# Altium PCB HV_Boost.PcbDoc
Units mm, origin at the board's own origin, x right, y up, seen from the top; angles counter-clockwise.
Board outline 160.78 x 71.12 mm, 4 copper layers (Power, Signal 1, Signal 2, GND), stack 0.603 mm thick; 49 components, 86 nets, 266 pads, 51 vias.
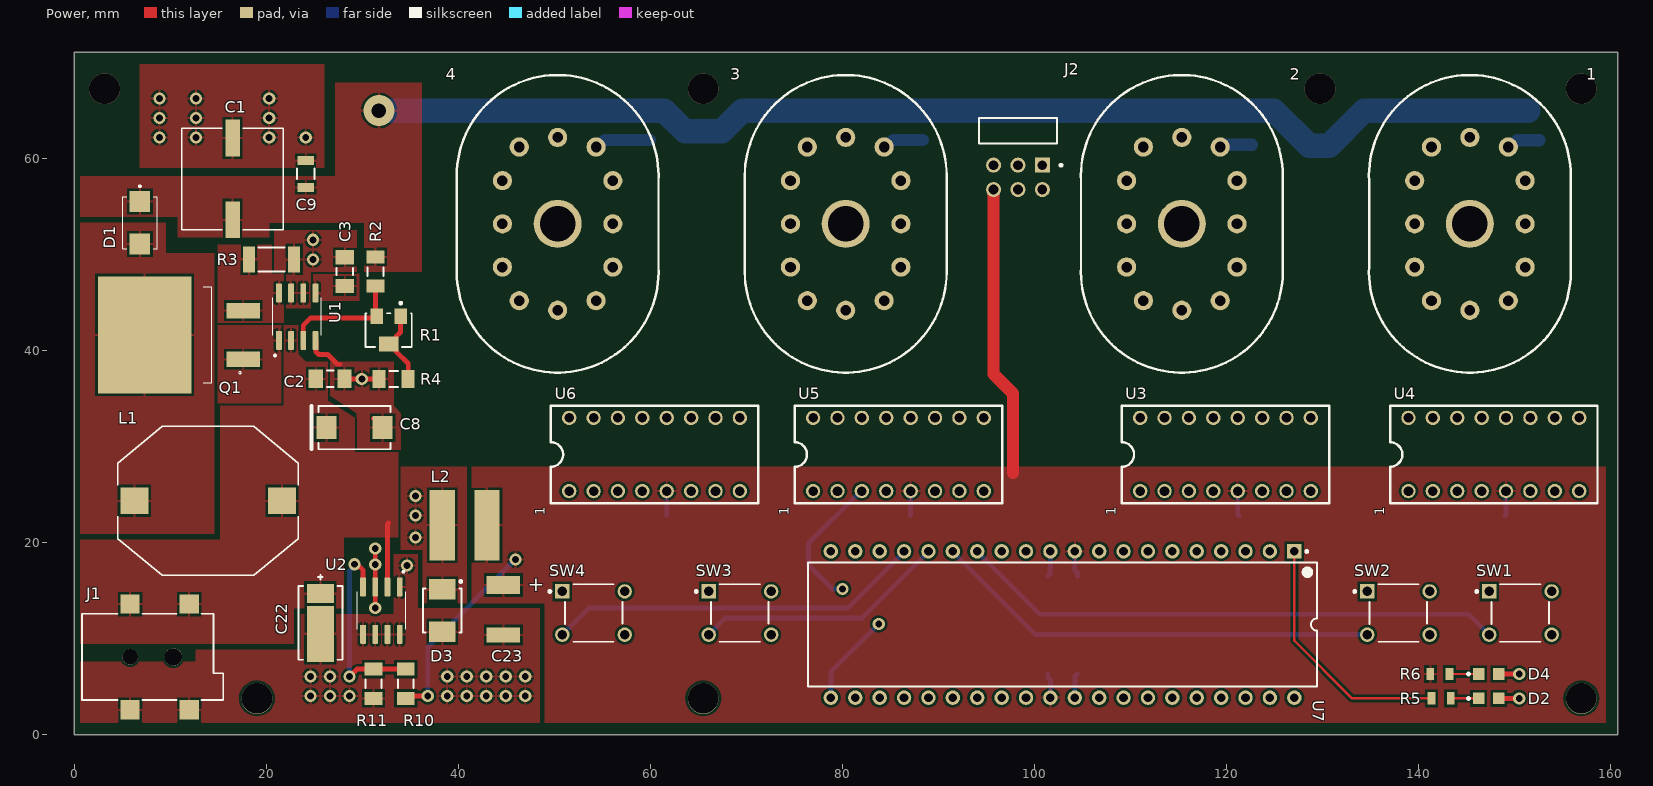
[diagram p0: Power view]
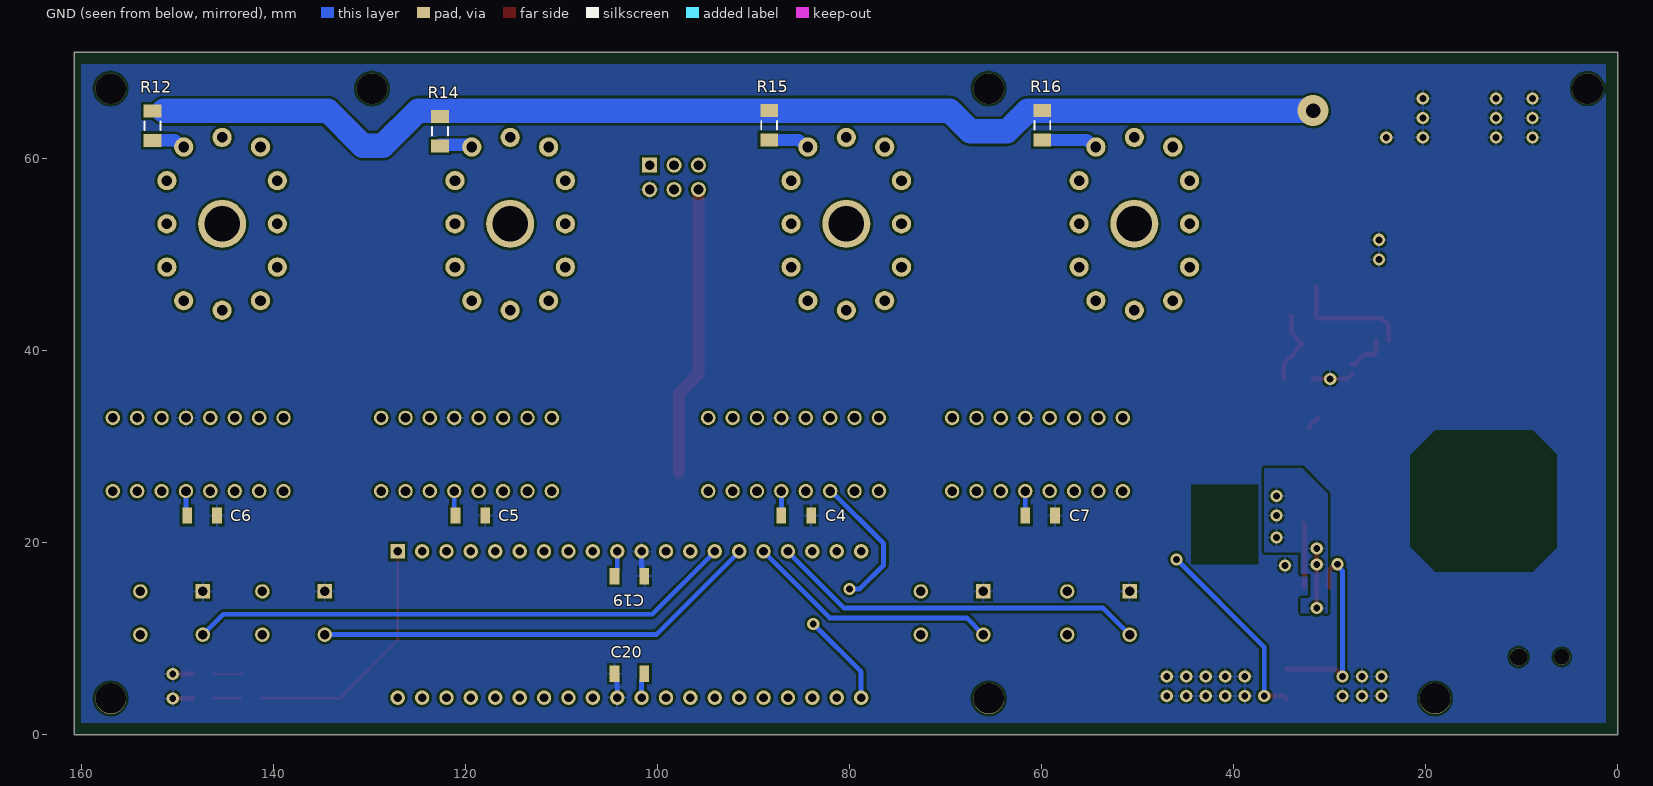
[diagram p1: GND view, seen from below]
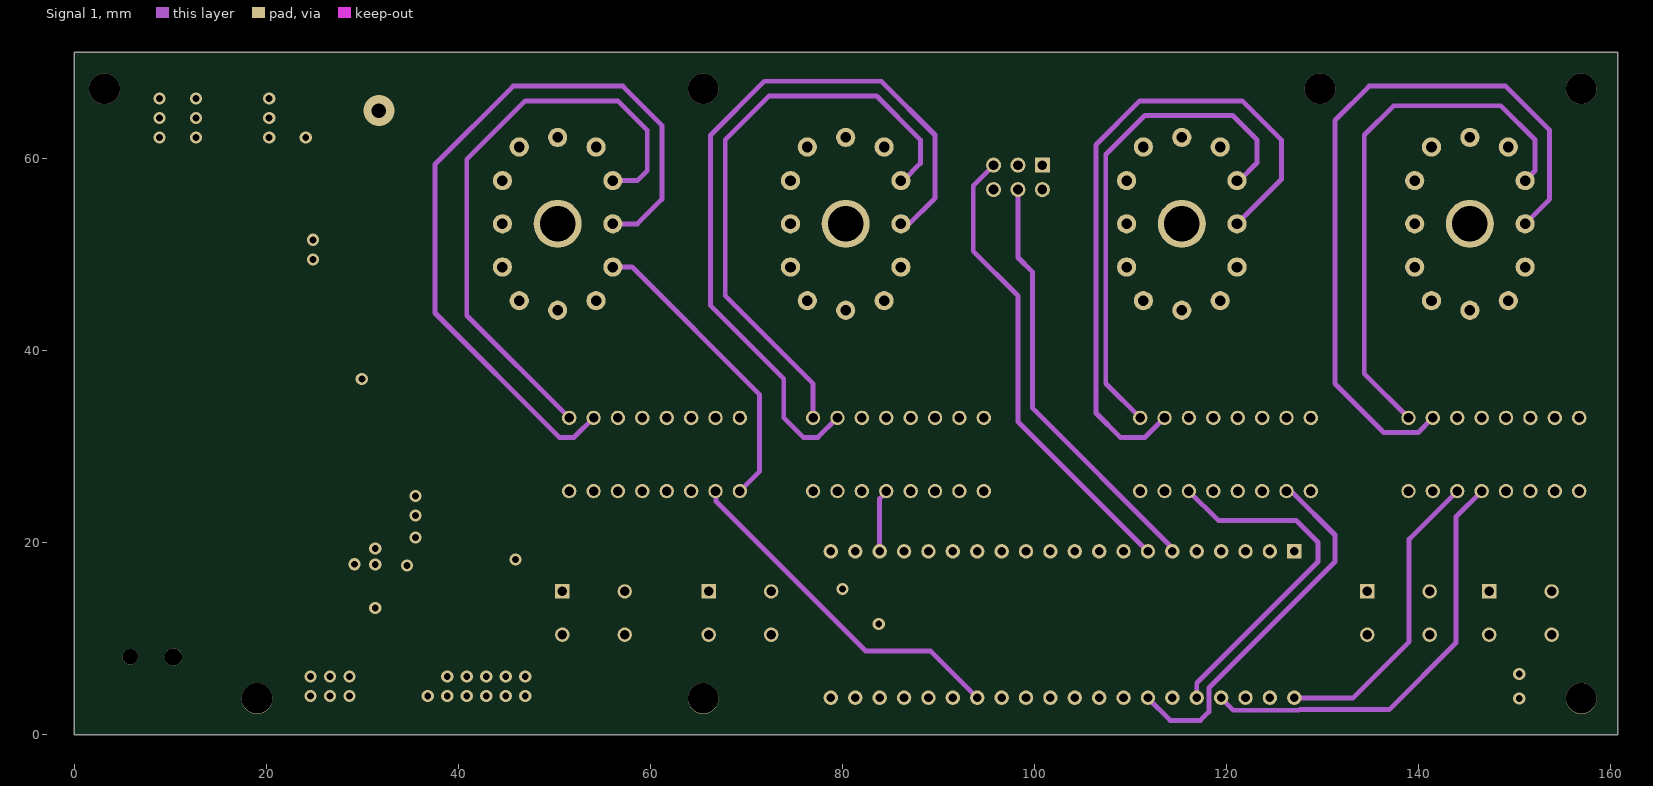
[diagram p2: Signal 1]
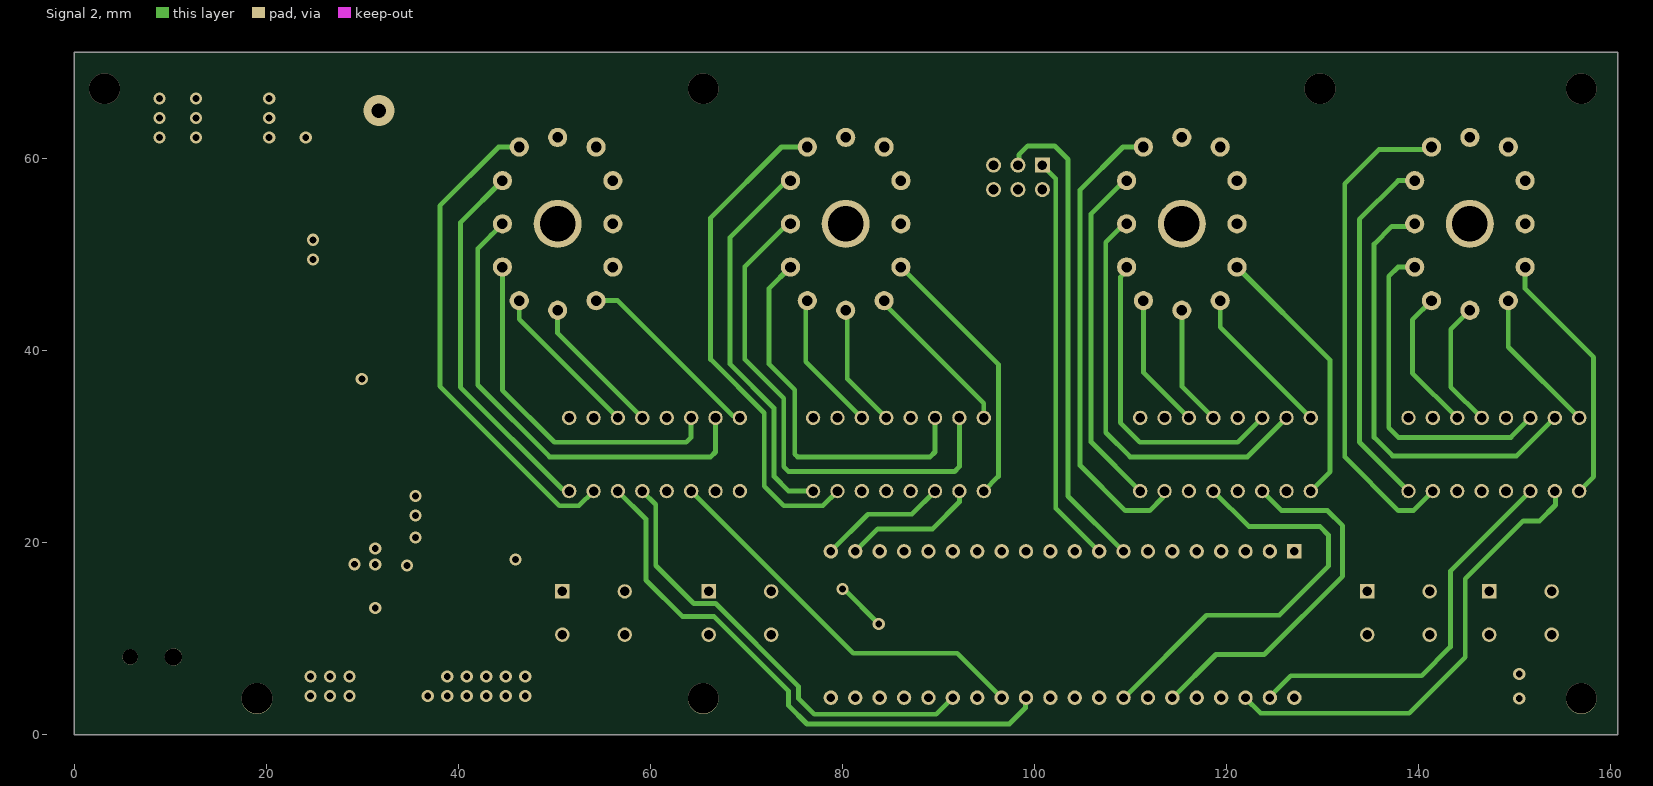
[diagram p3: Signal 2]
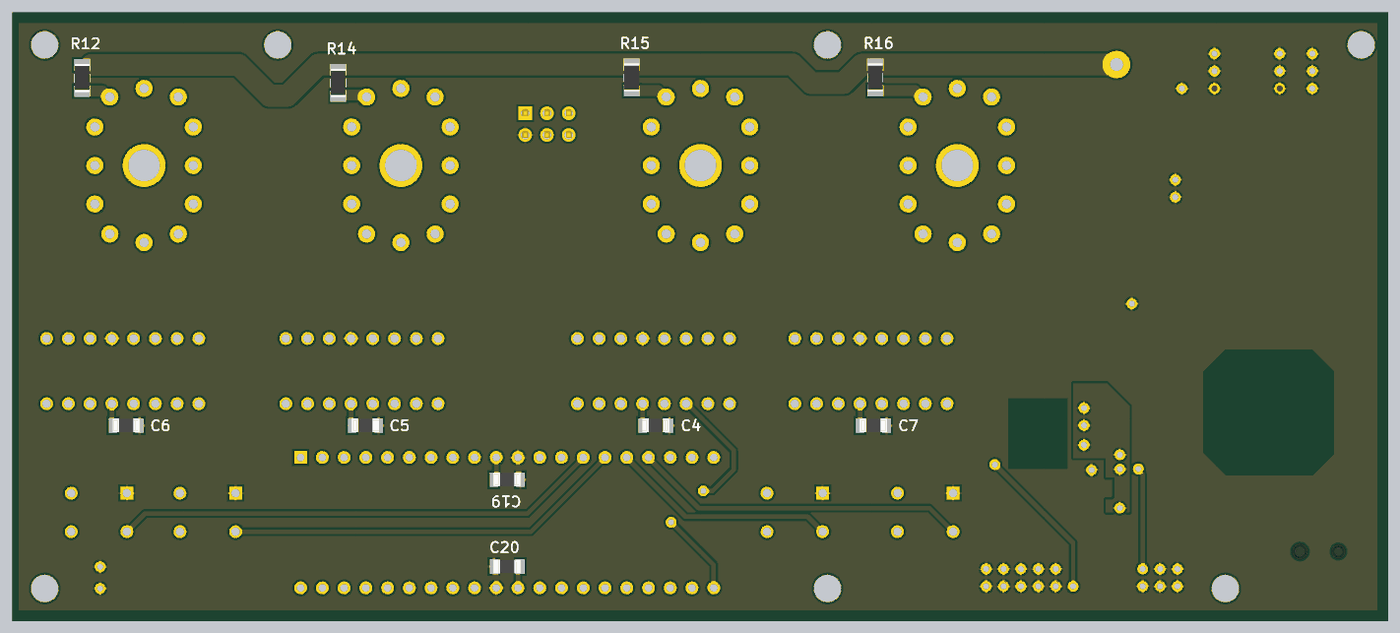
[diagram p4: 3D render of the assembled board from below, using the file's embedded part models]

## Layer stack, top to bottom
Top Solder: solder mask 0.0102, Solder Resist, Dk 3.5
Power: signal copper 0.0356
Dielectric 2: prepreg 0.0711, PP-006, Dk 4.1
Signal 1: signal copper 0.035
Dielectric 1: dielectric 0.32, FR-4, Dk 4.8
Signal 2: signal copper 0.035
Dielectric 3: prepreg 0.0711, PP-006, Dk 4.1
GND: signal copper 0.0356
Bottom Solder: solder mask 0.0102, Solder Resist, Dk 3.5

## Board outline
0,0 160.782,0 160.782,71.12 0,71.12

## Design rules (kind name [scope] priority, off if disabled: settings)
Clearance [All] p1: gap=0.254 ignorepadtopadclearanceinfootprint=FALSE except(0: Arc-Hole Track-Hole SMDPad-Hole THPad-Hole Via-Hole Fill-Hole Poly-Hole Region-Hole Text-Hole; 0.127: Arc-Arc Arc-Track Track-Track SMDPad-SMDPad; 0.2: Arc-SMDPad Arc-THPad Track-SMDPad Track-THPad; 0.5: THPad-THPad)
Height [All] p1: minheight=0 maxheight=50 prefheight=12.7
HoleSize [All] p1: absolutevalues=TRUE maxlimit=6.3 minlimit=0.2 maxpercent=80.000 minpercent=20.000
PolygonConnect [All] p1: connectstyle=Relief reliefconductorwidth=0.254 reliefentries=4 polygonreliefangle="90 Angle" airgapwidth=0.254
RoutingVias [All] p1: holewidth=0.711 width=1.27 viastyle="Through Hole" minholewidth=0.711 minwidth=1.27 maxholewidth=0.711 maxwidth=1.27
SolderMaskExpansion [All] p1: expansion=0.05 istentingtop=FALSE
Width [All] p1: maxlimit=2.54 minlimit=0.254 preferedwidth=0.254
28 further rules are at their usual default settings.

## Classes and differential pairs
component class MAX1771: C1 C2 C3 C8 C9 D1 L1 Q1 R1 R2 R3 R4 U1
component class MIC4690YM-TR: C22 C23 D3 D4 L2 L8 R6 R10 R11 U2
component class Buttons: SW1 SW2 SW3 SW4
component class ATMega1284p: C19 C20 D2 R5 U7
component class IN_12A: 1 2 3 4 C4 C5 C6 C7 R12 R14 R15 R16 U3 U4 U5 U6
component class Connectors: J1 J2

## Components (designator, comment, footprint, x,y, rotation, side; value= is the part's Value field where it differs from the comment)
1 "IN-12A" IN-12A 145.362,53.23 r0 top locked
2 "IN-12A" IN-12A 115.362,53.23 r0 top locked
3 "IN-12A" IN-12A 80.362,53.23 r0 top locked
4 "IN-12A" IN-12A 50.362,53.23 r0 top locked
C1 "EEV-EB2E100Q" CAP_UCD_10X10 16.51,57.912 r90 top
C2 "12065C104KAT2A" CAPC3216X94X50ML20T25 26.67,37.084 r0 top
C3 "12065C104KAT2A" CAPC3216X94X50ML20T25 28.194,48.26 r90 top
C4 "Capacitor - 0.1uF - 1206" FOOTPRINT-1206-GEN 85.572,22.86 r0 bottom value=0.1uF
C5 "Capacitor - 0.1uF - 1206" FOOTPRINT-1206-GEN 119.507,22.86 r0 bottom value=0.1uF
C6 "Capacitor - 0.1uF - 1206" FOOTPRINT-1206-GEN 147.447,22.86 r0 bottom value=0.1uF
C7 "Capacitor - 0.1uF - 1206" FOOTPRINT-1206-GEN 60.172,22.86 r0 bottom value=0.1uF
C8 "TPSD107K010R0100" AVX-7343-31_L 29.21,32.004 r0 top
C9 "C1206C104KARACTU" FP-C1206C-EB-MFG 24.13,58.42 r90 top value="0.10 μF"
C19 "Capacitor - 0.1uF - 1206" FOOTPRINT-1206-GEN 102.946,16.535 r0 bottom value=0.1uF
C20 "Capacitor - 0.1uF - 1206" FOOTPRINT-1206-GEN 102.946,6.375 r180 bottom value=0.1uF
C22 "47uF" FP-T528Z477M2R5ATE008-MFG 25.654,11.684 r90 top
C23 "595D107X06R3C2T" 595D107X06R3C2T 44.704,10.414 r0 top
D1 "ES2F" "DIOM5436X244N - duplicate" 6.858,53.34 r270 top
D2 "LGR971-KN-1" FOOTPRINT-OSRAM-CHIPLED-0805-1A2K 147.32,3.81 r0 top
D3 "SS22T3G" ONSC-SMB-2-403A-03_V 38.354,12.954 r270 top
D4 "LGR971-KN-1" FOOTPRINT-OSRAM-CHIPLED-0805-1A2K 147.32,6.35 r0 top
J1 "694106106102" 694106106102 7.692,8.128 r270 top
J2 "M20-9950345" FP-M20-9950345-MFG 98.298,62.865 r180 top locked
L1 "B82479A1104M000" IND_EPCOS_B82479A1 13.97,24.384 r0 top
L2 "CDRH6D38NP-180NC" CDRH6D38NP-180NC 38.354,21.844 r0 top
Q1 "IRF740 D2PAK" D2PAK 10.922,41.656 r180 top
R1 "3214W-1-502E" BOUR-3214W_V 32.766,42.164 r270 top
R2 "Resistor 1.5M +/-1% 1206 250 mW" RESC3216X60X45ML15T20 31.398,48.26 r90 top value=1.5M
R3 "0.05 1% 2010(5025)" RESC2010(5025)_N 20.574,49.53 r0 top value="100.00 Ohm"
R4 "Resistor 10k +/-1% 1206 250 mW" RESC3216X60X45ML15T20 33.274,37.084 r0 top value=10k
R5 "RMCF0805FT1K20" FOOTPRINT-0805-GEN 142.367,3.81 r180 top value=1.2k
R6 "RMCF0805FT1K20" FOOTPRINT-0805-GEN 142.24,6.35 r180 top value=1.2k
R10 "Resistor 3.01k +/-1% 1206 250 mW" RESC3216X60X45ML15T20 34.544,5.334 r270 top value=3.01k
R11 "Resistor 976 +/-1% 1206 250 mW" RESC3216X60X45ML15T20 31.193,5.334 r90 top value=976
R12 "Resistor 80k +/-1% 1206 250 mW" RESC3216X60X45ML15T20 152.603,63.449 r90 bottom value=80k
R14 "Resistor 80k +/-1% 1206 250 mW" RESC3216X60X45ML15T20 122.682,62.865 r90 bottom value=80k
R15 "Resistor 80k +/-1% 1206 250 mW" RESC3216X60X45ML15T20 88.392,63.5 r90 bottom value=80k
R16 "Resistor 80k +/-1% 1206 250 mW" RESC3216X60X45ML15T20 59.944,63.5 r90 bottom value=80k
SW1 "1825910-6" TECO-1825910-6_V 150.622,12.7 r0 top
SW2 "1825910-6" TECO-1825910-6_V 137.922,12.7 r0 top
SW3 "1825910-6" TECO-1825910-6_V 69.342,12.7 r0 top
SW4 "1825910-6" TECO-1825910-6_V 54.102,12.7 r0 top
U1 "MAX1771" 8-SOIC 23.241,43.561 r90 top
U2 "MIC4690YM-TR" TPS5402 32.004,12.954 r270 top
U3 "K155ID1" Socket_DIP_16 111.024,25.4 r90 top
U4 "K155ID1" Socket_DIP_16 138.964,25.4 r90 top
U5 "K155ID1" Socket_DIP_16 76.962,25.4 r90 top
U6 "K155ID1" Socket_DIP_16 51.562,25.4 r90 top
U7 "ATmega1284P-PU" 40P6 102.946,11.501 r270 top

## Footprints (in the part's own frame and the unit in brackets; to place one, negate y for a bottom-side part, rotate by r counter-clockwise, add the part's x,y. Pads: shape width x height; smd on the part's side, far side on the other; paste and mask are expansions set on the pad)
8-SOIC [mm]
  rrect25% 1.97x0.6 smd: 1(-2.47,1.905) 2(-2.47,0.635) 3(-2.47,-0.635) 4(-2.47,-1.905) 5(2.47,-1.905) 6(2.47,-0.635) 7(2.47,0.635) 8(2.47,1.905)
  silkscreen extent -4.14,-2.52 1.95,2.52
40P6 [mm] "40-Pin Ceramic Dual In-Line Package (CerDIP)"
  rect 1.5x1.5 hole 0.9: 1(-7.62,24.13)
  round 1.5 hole 0.9: 2(-7.62,21.59) 3(-7.62,19.05) 4(-7.62,16.51) 5(-7.62,13.97) 6(-7.62,11.43) 7(-7.62,8.89) 8(-7.62,6.35) 9(-7.62,3.81) 10(-7.62,1.27) 11(-7.62,-1.27) 12(-7.62,-3.81) 13(-7.62,-6.35) 14(-7.62,-8.89) 15(-7.62,-11.43) 16(-7.62,-13.97) 17(-7.62,-16.51) 18(-7.62,-19.05) 19(-7.62,-21.59) 20(-7.62,-24.13) 21(7.62,-24.13) 22(7.62,-21.59) 23(7.62,-19.05) 24(7.62,-16.51) 25(7.62,-13.97) 26(7.62,-11.43) 27(7.62,-8.89) 28(7.62,-6.35) 29(7.62,-3.81) 30(7.62,-1.27) 31(7.62,1.27) 32(7.62,3.81) 33(7.62,6.35) 34(7.62,8.89) 35(7.62,11.43) 36(7.62,13.97) 37(7.62,16.51) 38(7.62,19.05) 39(7.62,21.59) 40(7.62,24.13)
  silkscreen extent -7.74,-26.5 6.45,26.5, body extent -7.05,-26.47 7.05,26.47, height 5.72
595D107X06R3C2T [mm]
  rect 3.5x1.9 smd: 1(0,5.2)
  rect 3.5x1.6 smd: 2(0,0)
  body extent -1.73,-0.79 1.73,6.12, height 3
694106106102 [mm] "DC Power Jack Right Angled SMT ?6.4 with 4 soldering pads & pegs"
  rect 2x2 smd: 1(-5.5,4.3) 1(-5.5,-1.85) 2(5.5,-1.85) 3(5.5,4.3)
  round 1.6 hole 1.6 unplated: MH1(0,-1.85)
  round 1.8 hole 1.8 unplated: MH2(0,2.65)
  silkscreen extent -4.5,-6.85 4.5,7.85, body extent -6.25,-6.85 6.25,7.85, height 11.05
AVX-7343-31_L [mm] "Molded Capacitor, 2-Leads, Body 7.5x4.5mm, IPC High Density"
  rect 2.1x2.4 smd: 1(-2.925,0) 2(2.925,0)
  silkscreen extent -4.47,-2.25 3.75,2.25, body extent -3.97,-2.25 3.97,2.25, height 3.1
BOUR-3214W_V [mm] "SMD, 3-Leads, Body 3.5x4.8mm, Pitch 1.25mm"
  rect 1.6x1.3 smd paste+0: 1(-1.45,1.25) 3(-1.45,-1.25)
  rect 1.6x2 smd paste+0: 2(1.45,0)
  silkscreen extent -2.92,-2.4 1.75,2.4, body extent -1.98,-2.41 1.98,2.41, height 5.28
CAP_UCD_10X10 [mil]
  rect 150x59 smd paste+0 mask+0: 1(-167.5,0) 2(167.5,0)
  silkscreen extent -208,-208 208,208, body extent -222,-203 222,203, height 415
CAPC3216X94X50ML20T25 [mm] "Chip Capacitor, 2-Leads, Body 3.20x1.60mm, IPC Low Density"
  rect 1.5x1.9 smd: 1(-1.5,0) 2(1.5,0)
  silkscreen extent -0.35,-0.85 0.35,0.85, body extent -1.7,-0.9 1.7,0.9, height 0.94
CDRH6D38NP-180NC [mm]
  rect 2.65x7.3 smd: 1(0,0) 2(4.65,0)
  body extent -1.3,-3.63 5.94,3.63, height 4
D2PAK [mm]
  rect 3.5x1.6 smd: 1(-6.7,2.54) 3(-6.7,-2.54)
  rect 9.75x12.2 smd paste-7: 4(3.575,0)
  silkscreen extent -6.48,-5 -2.51,5
"DIOM5436X244N - duplicate" [mm]
  rect 2.18x2.12 smd: 1(-2.215,0) 2(2.215,0)
  silkscreen extent -3.9,-1.81 2.7,1.81
FOOTPRINT-0805-GEN [mm] "1/8 Watt"
  rect 0.8x1.3 smd: 1(-1,0) 2(1,0)
  body extent -1,-0.6 1,0.6, height 0.71
FOOTPRINT-1206-GEN [mm] "1/4 Watt"
  rect 1x1.7 smd: 1(-1.55,0) 2(1.55,0)
  body extent -1.6,-0.8 1.6,0.8, height 0.71
FOOTPRINT-OSRAM-CHIPLED-0805-1A2K [mm] "Rectangle with Flat Top 1.30mm x 1.25mm"
  rect 1.2x1.2 smd: 1(-1.05,0) 2(1.05,0)
  silkscreen extent -2.1,0 -2.1,0, body extent -1.01,-0.62 0.99,0.63, height 0.8
FP-C1206C-EB-MFG [mm]
  rect 0.95x1.7 smd paste+0 mask+0: 1(-1.4,0) 2(1.4,0)
  silkscreen extent -0.55,-0.9 0.55,0.9, body extent -2,-1 2,1, height 0.25
FP-M20-9950345-MFG [mm]
  rect 1.57x1.57 hole 1.02 paste-1000 mask+0: 1(-2.54,3.53)
  round 1.57 hole 1.02 paste-1000 mask+0: 2(-2.54,6.07) 3(0,3.53) 4(0,6.07) 5(2.54,3.53) 6(2.54,6.07)
  silkscreen extent -4.61,-1.37 4.06,3.65, body extent -3.81,-7.37 3.81,6.39, height 5.28
FP-T528Z477M2R5ATE008-MFG [mm]
  rect 5.82x2.82 smd paste+0 mask+0: 1(-1.15,0)
  rect 2.02x2.82 smd paste+0 mask+0: 2(3.05,0)
  silkscreen extent -3.85,-2.3 5,2.3, body extent -4.18,-2.42 4.18,2.42, height 0.25
IN-12A [mm]
  round 2 hole 1.1: 1(4,8) 2(5.75,4.5) 3(5.75,0) 4(5.75,-4.5) 5(4,-8) 6(0,-9) 7(-4,-8) 8(-5.75,-4.5) 9(-5.75,0) 10(-5.75,4.5) 11(-4,8) 12(0,9)
  round 5 hole 3.7: ""(0,0)
  silkscreen extent -10.51,-15.49 10.51,15.49, body extent -10,-15.24 10,15.24, height 28
IND_EPCOS_B82479A1 [mil]
  rect 115x110 smd paste+0 mask+0: 1(-302.5,0) 2(302.5,0)
  silkscreen extent -370,-305 370,305, body extent -377,-300 377,300, height 292
ONSC-SMB-2-403A-03_V [mm] "Molded, 2-Leads, Body 4.6x3.95mm"
  rect 2.159x2.743 smd: 1(-2.21,0) 2(2.21,0)
  silkscreen extent -3.16,-2 2.3,2.05, body extent -2.3,-1.97 2.3,1.97, height 2.47
RESC2010(5025)_N [mm] "Chip Resistor, Body 5.0x2.5mm, IPC Medium Density"
  rect 1.25x2.7 smd: 1(-2.35,0) 2(2.35,0)
  silkscreen extent -1.35,-1.25 1.35,1.25, body extent -2.6,-1.35 2.6,1.35, height 0.71
RESC3216X60X45ML15T20 [mm] "Chip Resistor, 2-Leads, Body 3.3x1.75mm, IPC Low Density"
  rect 1.35x1.85 smd: 1(-1.525,0) 2(1.525,0)
  silkscreen extent -0.45,-0.82 0.45,0.82, body extent -1.65,-0.87 1.65,0.87, height 0.6
Socket_DIP_16 [mm]
  round 1.5 hole 1: 1(0,0) 2(0,-2.54) 3(0,-5.08) 4(0,-7.62) 5(0,-10.16) 6(0,-12.7) 7(0,-15.24) 8(0,-17.78) 9(7.62,-17.78) 10(7.62,-15.24) 11(7.62,-12.7) 12(7.62,-10.16) 13(7.62,-7.62) 14(7.62,-5.08) 15(7.62,-2.54) 16(7.62,0)
  silkscreen extent -1.27,-19.68 8.89,1.91
TECO-1825910-6_V [mm] "Switch, 4-Leads, Body 5.99x5.99mm"
  rect 1.5x1.5 hole 0.99: 1(-3.25,2.25)
  round 1.5 hole 0.99: 2(3.25,2.25) 3(-3.25,-2.25) 4(3.25,-2.25)
  silkscreen extent -4.67,-2.99 2.99,3, body extent -3,-2.99 2.99,3, height 5
TPS5402 [mm]
  rrect25% 1.97x0.6 smd: 1(-2.47,1.905) 2(-2.47,0.635) 3(-2.47,-0.635) 4(-2.47,-1.905) 5(2.47,-1.905) 6(2.47,-0.635) 7(2.47,0.635) 8(2.47,1.905)
  silkscreen extent -4.14,-2.52 1.95,2.52

## Part data
C1: library part UUB2E4R7MNL1GS, Built_By=EMA_Cory, Copyright="Copyright (C) 2018 Accelerated Designs. All rights reserved", Manufacturer_Part_Number=UUB2E4R7MNL1GS, RefDes=RefDes, SourceLibrary=Nichicon_2019-09-13, Type=DEV, Vendor=Nichicon
C2 C3: library part CMP-2000-05018-1, "Chip Capacitor, Ceramic, 100 nF, 10%, 50 V, 1206, RoHS, Tape and Reel / 12065C104KAT2A", Capacitance=100nF, Case Size/Dimension=1206, Dielectric=X7R, Manufacturer=AVX, Rated Voltage=50V, Tolerance (%)=±10%, Datasheet URL=http://www.mouser.com/ds/2/40/cauto-360.pdf, Datasheet Version=Sep-14, Manufacturer URL=http://www.avx.com/
C4 C5 C6 C7 C19 C20: library part CMP-001-00096-1, "CAP CER 0.1UF 50V X7R 1206", Part Number=1276-7034-1-ND, Design Item ID=Capacitor-Generic-1206, LatestRevisionNote="Re-released for DXP Platform.", PackageDescription="Radial Cap, Thru-Hole; 2 Leads; 0.3 in Pin Spacing", PackageReference=RAD-0.3, Published=8-Jun-2000, Publisher="Altium Limited", Source=Generic.SchLib, Type=Capacitor
C8: library part CMP-2000-07298-1, "Tantalum Capacitor, 100 uF, +/- 10%, 10 V, -55 to 125 degC, 2917 (7343 Metric), RoHS, Tape and Reel / TPSD107K010R0100", Capacitance=100µF, ESR (Equivalent Series Resistance)=100mOhm, Lifetime @ Temp.=-, Manufacturer=AVX, Manufacturer Size Code=D, Operating Temperature=-55°C~125°C, Package / Case=2917(7343Metric), Package Description="2-Pin Surface Mount Device, Body 7.3 x 4.35 mm", Package Reference=7343-31, Standard Package=1, Tolerance=±10%, Voltage - Rated=10V, Catalog Drawings=TPSSeriesSides, Category=Capacitors, Datasheet URL=http://datasheets.avx.com/TPS.pdf, Datasheet Version=01/2017, Family=TantalumCapacitors, Featured Product=TPSCapacitors, Features=GeneralPurpose, Height - Seated (Max)="0.122\"(3.10mm)", Lead Spacing=-, Manufacturer URL=http://www.avx.com/, Mounting Technology=SurfaceMount, Mounting Type=SurfaceMount, Online Catalog=TPSSeries, Other Names=478-1777-1, Packaging=CutTape(CT), Product Training Modules=ComponentSolutionsforSmartMeterApplications, Series=TPS, Size / Dimension="0.287\"Lx0.169\"W(7.30mmx4.30mm)", Type=Molded
C9: library part CMP-1037-04229-2, "CAP CER 0.1UF 250V X7R 1206 / C1206C104KARACTU", Capacitance="0.10 μF", Manufacturer=KEMET, Package=C1206C-EB, Temperature="-55°C to +150°C", Temperature Characteristic=X7R, Temperature Coefficient=15%, Temperature Range High=+150°C, Temperature Range Low=-55°C, Tolerance=0.1, Voltage Rating="250 V", Automotive=Yes, Automotive Grade="Grade 0", Category=Cap, ComponentLink2Description=Datasheet, ComponentLink2URL=https://content.kemet.com/datasheets/KEM_C1007_X8R_ULTRA_150C_SMD.pdf, Device Class L1="Passive Components", Device Class L2=Capacitors, Device Class L3="Ceramic Capacitors", Digikey Description="CAP CER 0.1UF 250V X7R 1206", Height=0.88mm, Ipc Land Pattern Name=CAPC320160X78, Lead Free=Yes, Manufacturer Part Number=C1206C104KARACTU, Material=Ceramic, Mouser Description="Multilayer Ceramic Capacitors MLCC - SMD/SMT 250volts 0.1uF X7R 10%", Octopart=https://octopart.com/c1206c104karactu-kemet-193627, RoHS=TRUE
C22: library part CMP-03017-000005-1, "CAP TANT 47UF 20% 20V 2917 / 595D476X0020D2T", Capacitance=470uF, Case Code (Imperial)=2917, Case Code (Metric)=7343, ESR (Equivalent Series Resistance)=8mR, Leakage Current=118uA, Max Operating Temperature=105°C, Min Operating Temperature=-55°C, Package Quantity=1, Ripple Current=6.4A, Tolerance=20%, Voltage Rating=2.5V, Case/Package=2917, Construction=Flat, Depth=4.3mm, Dissipation Factor=10%, Features="General Purpose", Height=1.7mm, Height - Seated (Max)=0.067inch, Length=7.3mm, Mount="Surface Mount", Packaging="Tape and Reel", Polarity=Polar, REACH SVHC="No SVHC", RoHS Compliant=Yes, Series="KO-CAP T528", Termination=SMD/SMT, Voltage Rating (DC)=2.5V, Width=0.169inch
C23: "595D107X06R3C2T / 100uF, 6.3V"
D1: library part ES2F_1
D2 D4: library part CMP-017-000003-2, "LED Uni-Color Green 572nm 2-Pin Chip 0805(2012Metric) T/R", Current - Maximum=25mA, Current - Test=20mA, Forward Voltage=2.2V, Part Number=475-1410-1-ND, Design Item ID=LED-OSRAM-LG-R971-KN-1, Source=Discrete.SchLib
D3: library part CMP-1055-00373-1, "Schottky Power Rectifier, 2-Pin SMB, Pb-Free, Tape and Reel", Manufacturer="On Semiconductor", ComponentLink1Description="Manufacturer URL", ComponentLink1URL=http://www.onsemi.com/, ComponentLink2Description=Datasheet, ComponentLink2URL=http://www.onsemi.cn/pub_link/Collateral/SS24-D.PDF, ComponentLink3Description="Package Specification", ComponentLink3URL=http://www.onsemi.com/pub_link/Collateral/403A-03.PDF, Configuration=Single, DatasheetVersion="Rev. 4", IFSM Max (A)=75, Mounting Technology="Surface Mount", PackageDescription="2-Pin Small Molded Package, J-Bend Lead, Body 4.33 x 3.625 mm", PackageReference=SMB-2-403A-03, PackageVersion="Rev. J, 07/2012", Packing="Tape and Reel", PartNumber=SS22T3G, RoHS=TRUE
J1: library part CMP-1502-00177-1, "DC Power Jack Connector with 4 soldering pads & Pegs WR-DC, Male, Right Angled, SMT, 5 A, 24 V", Manufacturer="Wurth Elektronik", Operating Temperature=-40to85degC, Rated Current=5A, Working Voltage=24V, Datasheet URL=http://katalog.we-online.de/em/datasheet/6941xx106102.pdf, Gender=Male, Manufacturer URL=http://www.we-online.de, Mounting Technology=SMT, Opening Diameter=6.4mm, Orientation=RightAngled, Package Reference=694106106102, Packaging=TapeandReel, Part Number=694106106102, Plug Inner Diameter=2.05mm, Plug Outer Diameter=5.5mm, Publisher=WurthElektronik
J2: library part CMP-15831-000002-1, "CONN HEADER R/A 6POS 2.54MM", Current Rating=3A, Manufacturer=Harwin, Package=0, Temperature="-40°C to +105°C", Temperature Range High=+105°C, Temperature Range Low=-40°C, Automotive=No, Category=Conn, ComponentLink2Description=Datasheet, ComponentLink2URL=https://cdn.harwin.com/pdfs/M20-995.pdf, Conn Gender=Male, Conn Orientation="Right Angle", Contact Material=Gold,Nickel, Device Class L1=Connectors, Device Class L2="Headers and Wire Housings", Device Class L3=unset, Digikey Description="CONN HEADER R/A 6POS 2.54MM", Height=5.28mm, Ipc Land Pattern Name=DFN400X400X80-14, Lead Free=Yes, Manufacturer Part Number=M20-9950345, Mouser Description="Headers & Wire Housings 03+03 DIL HORIZONTAL PIN HEADER GOLD HT", Number Of Contacts=6, Number Of Rows=2, Octopart=https://octopart.com/m20-9950345-harwin-21265213, Pitch=2.54mm, RoHS=TRUE
L1: "No Description Available", Built_By=EMA_UL_Team, Copyright="Copyright (C) 2021 Accelerated Designs. All rights reserved", Manufacturer_Part_Number=B82479A1104M000, RefDes=RefDes, SourceLibrary=Epcos_2010-01-01_Inductors, Type=DEV, Vendor=Epcos
R1: library part CMP-2000-05579-1, "3214 - 5-Turn Trimpot(R) Trimming Potentiometer, 5 KOhm, +/- 10%, 0.25 W, -65 to 150 degC, RoHS, Tape and Reel", Manufacturer=Bourns, Package Description="3-Pin Surface Mount Device, Body 3.5 x 4.8 mm, Pitch 1.25 mm", Package Reference=3214W, Power Rating=250mW, Resistance Tolerance=±10%, Temperature Coefficient=±100ppm/°C, Track Resistance=5kohm, Datasheet URL=http://www.bourns.com/docs/Product-Datasheets/3214.pdf, Datasheet Version=05/2016, Manufacturer URL=http://www.bourns.com/, Mounting Technology=SurfaceMount, No. of Turns=5, Potentiometer Mounting=SMD, RoHS Compliant=Yes, SVHC=NoSVHC(16-Jun-2014)
R2: library part CMP-009-00016-4, "Chip Resistor, 1.5M Ohm, +/- 1%, 0.25 W, -55 to 155 degC, 1206 (3216 Metric)", Case/Package=1206, Max Operating Temperature=155°C, Min Operating Temperature=-55°C, Power=250mW, Tolerance=1%, Voltage Rating=200V, Mounting Technology=SM, Pins=2, RoHS Compliant=True
R3: library part CMP-1017-00397-1, "0.05.75W 1% 2010 (5025 Metric)  SMD /  LR2010-R05FW", Case-EIA=2010, Case-Metric=5025, Power="0.75 W", Tolerance="1 %", Technology=SMT
R4: library part CMP-009-00016-4, "Chip Resistor, 10 KOhm, +/- 1%, 0.25 W, -55 to 155 degC, 1206 (3216 Metric)", Case/Package=1206, Max Operating Temperature=155°C, Min Operating Temperature=-55°C, Power=250mW, Tolerance=1%, Voltage Rating=200V, Mounting Technology=SM, Pins=2, RoHS Compliant=True
R5 R6: library part CMP-009-00185-2, "Res Thick Film 0805 1.2K Ohm 1% 0.125W ±100ppm/°C Molded SMD Paper T/R", Design Item ID=Resistor-Generic-0805-2012, Source=Generic.SchLib, Type=Resistor
R10: library part CMP-009-00016-4, "Chip Resistor, 3.01KOhm, +/- 1%, 0.25 W, -55 to 155 degC, 1206 (3216 Metric)", Case/Package=1206, Max Operating Temperature=155°C, Min Operating Temperature=-55°C, Power=250mW, Tolerance=1%, Voltage Rating=200V, Mounting Technology=SM, Pins=2, RoHS Compliant=True
R11: library part CMP-009-00016-4, "Chip Resistor, 976Ohm, +/- 1%, 0.25 W, -55 to 155 degC, 1206 (3216 Metric)", Case/Package=1206, Max Operating Temperature=155°C, Min Operating Temperature=-55°C, Power=250mW, Tolerance=1%, Voltage Rating=200V, Mounting Technology=SM, Pins=2, RoHS Compliant=True
R12 R14 R15 R16: library part CMP-009-00016-4, "Chip Resistor, 80 KOhm, +/- 1%, 0.25 W, -55 to 155 degC, 1206 (3216 Metric)", Case/Package=1206, Max Operating Temperature=155°C, Min Operating Temperature=-55°C, Power=250mW, Tolerance=1%, Voltage Rating=200V, Mounting Technology=SM, Pins=2, RoHS Compliant=True
SW1 SW2 SW3 SW4: library part CMP-1684-00021-1, "Tact Switch, SPST-NO, 0.05 A, -35 to 85 degC, 4-Pin THD, RoHS, Bulk", Actuator Color=Black, Contact Rating @ Voltage=0.05A@24VDC, Dielectric Strength=500VAC, Manufacturer="TE Connectivity", Maximum AC Voltage Rating=N/A, Maximum Contact Resistance=100mOhm, Maximum DC Voltage Rating=24V, Minimum Insulation Resistance=100MOhm, Operating Temperature=-35to85C, Package Description="4-Pin Through Hole Device, Body 5.99 x 5.99 mm, Pitch 6.5 mm", Package Reference=THD, Actuator Length=1.4mm, Actuator Material=PolybutyleneTerephthalate, Actuator Style=RoundButton, Base Material=N/A, Body Orientation=Straight, Bushing Type=Unthreaded, Contact Material=CopperAlloy, Contact Plating=Silver, Datasheet URL=http://www.te.com/commerce/DocumentDelivery/DDEController?Action=showdoc&DocId=Customer+Drawing%7F1825910%7FC9%7Fpdf%7FEnglish%7FENG_CD_1825910_C9.pdf%7F1825910-6, Datasheet Version="Rev. C9", Dimension=5.99x5mm, Electrical Life=100000Cycles, Family=1825910, Function=MomentaryContact, Housing Material=N/A, Illumination=N/R, Manufacturer URL=http://www.te.com, Mechanical Life=100000Cycles, Mounting=ThroughHole, Packaging=N/A, Part No=1825910-6, Pole Throw Configuration=SPST, Product Weight=N/A, RoHS=Yes, Seal Description=N/A, Seal Location=N/A, Switch Configuration=OFF(ON), Terminal Type=PCPins, Thread Size=N/R
U7: library part CMP-0107-00007-2, "8-bit AVR Microcontroller, 128KB Flash, 4KB EEPROM, 16KB SRAM, 40-pin PDIP, Industrial Grade (-40°C to 85°C)", Code_JEDEC=MS-011-AC, ComponentLink1Description="Manufacturer URL", ComponentLink1URL=http://www.atmel.com/, ComponentLink2Description="ATmega164A/164PA/324A/324PA/644A/644PA/1284/1284P Datasheet", ComponentLink2URL=http://www.atmel.com/dyn/resources/prod_documents/doc8272.pdf, ComponentLink3Description="ATmega164A/164PA/324A/324PA/644A/644PA/1284/1284P Summary", ComponentLink3URL=http://www.atmel.com/dyn/resources/prod_documents/8272S.pdf, DatasheetVersion="revC, Jun-2011", PackageDescription="40-lead (0.600\"/15.24mm Wide) Plastic Dual Inline Package (PDIP)", PackageReference=40P6, PackageVersion="revB, Sep-2001"

## Via types
v1: diameter 1.27, hole 0.711, Power to GND, 43 vias
v2: diameter 3.2, hole 3.198, Power to GND, 7 vias
v3: diameter 3.2, hole 1.524, Power to GND, 1 vias

## Nets (pads, with @x,y where several pads share a name; then routed paths per layer and width w, separated by ;. In a path a pad name is that pad's centre, name@x,y a point inside that pad or via, vN(x,y) a via of type N, cw(c..) or ccw(c..) an arc to the next point about the centre after c; other vN are vias at no path point)
+5V: C4.2 C5.2 C6.2 C7.2 C19.2 C20.2 C23.1 J2.6 L2.2 R6.2 R10.2 U3.5 U4.5 U5.5 U6.5 U7.10 U7.30 | length 66.3
  Power w0.508: R10.2 34.799,4.064 v1(36.83,4.064)
  Power w1.27: J2.6 95.758,37.592 97.79,35.56 97.79,27.305
  GND w0.508: v1(36.83,4.064) 36.83,9.144 v1(45.974,18.288) ; C7.2 U6.5 ; C4.2 U5.5 ; C20.2 101.396,6.025 101.676,5.745 U7.30 U7.30@101.676,3.835 ; U7.10@104.216,19.075 104.216,17.165 104.496,16.885 C19.2 ; U3.5 121.184,23.013 C5.2@121.337,22.86 ; C6.2 149.124,22.987 U4.5
+12V: C2.1 C8.1 C22.2 J1.1 L1.2 U1.2 U2.2 | length 6.7
  Power w0.508: U2.2 32.639,21.971 32.766,22.098
GND: C1.2 C2.2 C3.2 C4.1 C5.1 C6.1 C7.1 C8.2 C9.2 C19.1 C20.1 C22.1 C23.2 D2.2 D3.2 D4.2 J1.2 J1.3 J2.2 R3.2 R4.1 R11.1 SW1.1 SW2.1 SW3.1 SW4.1 U1.4 U1.6 U1.7 U2.1 U2.5 U2.6 U2.7 U2.8 U3.12 U4.12 U5.12 U6.12 U7.11 U7.31 | length 19.5
  Power w0.508: U1.4 25.191,41.046 25.191,39.922 25.488,39.624 26.416,39.624 27.432,38.608 27.686,38.608 ; C2.2@27.682,37.572 C2.2 v1(29.972,37.084) R4.1 ; C8.2@31.189,32.95 31.339,32.95 32.135,32.154 C8.2 ; D2.2 v1(150.495,3.81) ; D4.2 v1(150.495,6.35)
  GND w0.508: C19.1 101.642,16.781 101.642,17.395 101.676,17.429 U7.11@101.676,19.075 ; U7.31@104.216,3.835 U7.31 104.216,5.482 104.25,5.516 104.25,6.129 C20.1
  other v1: 24.638,4.064 26.67,4.064 28.702,4.064 38.862,4.064 40.894,4.064 42.926,4.064 44.958,4.064 46.99,4.064 24.638,6.096 26.67,6.096 38.862,6.096 40.894,6.096 42.926,6.096 44.958,6.096 46.99,6.096 34.671,17.653 24.892,49.53 24.892,51.562 8.89,62.23 12.7,62.23 20.32,62.23 24.13,62.23 8.89,64.262 12.7,64.262 20.32,64.262 8.89,66.294 12.7,66.294 20.32,66.294
HV+: C1.1 C9.1 D1.1 R2.2 R12.2 R14.2 R15.2 R16.2 | length 124.7
  GND w2.54: v3@31.497,65.025 61.467,65.025 63.627,62.865 67.437,62.865 69.597,65.025 R15.2 122.682,65.025 124.967,65.025 128.615,61.377 130.719,61.377 134.332,64.99 151.445,64.99
  other v3: 31.75,65.024
Net1_1: 1.1 R12.1 | length 3.5
  GND w1.27: 1.1 149.56,61.23 150.254,61.924 R12.1
Net1_2: 1.2 U4.16 | length 56.6
  Signal 1 w0.508: U4.16 134.366,37.618 134.366,62.484 137.414,65.532 148.59,65.532 152.146,61.976 152.146,58.767 151.112,57.733 1.2
Net1_3: 1.3 U4.15 | length 77.1
  Signal 1 w0.508: U4.15 139.98,31.496 136.398,31.496 131.318,36.576 131.318,64.008 134.874,67.564 149.098,67.564 153.67,62.992 153.67,55.788 1.3@150.971,53.089
Net1_4: 1.4 U4.8 | length 26.9
  Signal 2 w0.508: 1.4 151.112,46.472 158.242,39.342 158.242,26.898 U4.8
Net1_5: 1.5 U4.9 | length 15.3
  Signal 2 w0.508: 1.5 149.362,40.402 U4.9
Net1_6: 1.6 U4.13 | length 13.4
  Signal 2 w0.508: 1.6 143.374,42.242 143.374,36.23 U4.13
Net1_7: 1.7 U4.14 | length 15
  Signal 2 w0.508: 1.7 139.374,43.242 139.374,37.69 U4.14
Net1_8: 1.8 U4.11 | length 34.9
  Signal 2 w0.508: 1.8 137.884,48.73 136.906,47.752 136.906,32.004 137.922,30.988 149.632,30.988 U4.11
Net1_9: 1.9 U4.10 | length 46.4
  Signal 2 w0.508: 1.9@139.612,52.96 137.22,52.96 135.382,51.122 135.382,30.988 137.312,29.058 150.242,29.058 U4.10
Net1_10: 1.10 U4.1 | length 37.8
  Signal 2 w0.508: U4.1 133.858,30.506 133.858,53.694 137.894,57.73 1.10
Net1_11: 1.11 U4.2 | length 51.3
  Signal 2 w0.508: 1.11@141.362,60.96 135.89,60.96 132.334,57.404 132.334,28.956 137.922,23.368 139.472,23.368 U4.2
Net2_1: 2.1 R14.1 | length 3.4
  GND w1.27: 2.1 119.56,61.23 119.797,61.467 R14.1@122.682,61.467
Net2_2: 2.2 U3.16 | length 52.6
  Signal 1 w0.508: U3.16 107.442,36.602 107.442,60.452 111.506,64.516 120.65,64.516 123.19,61.976 123.19,59.575 121.345,57.73 2.2
Net2_3: 2.3 U3.15 | length 70.5
  Signal 1 w0.508: U3.15 111.532,30.988 108.966,30.988 106.426,33.528 106.426,61.468 110.998,66.04 121.666,66.04 125.73,61.976 125.73,57.848 2.3
Net2_4: 2.4 U3.8 | length 28.2
  Signal 2 w0.508: 2.4 130.81,39.032 130.81,27.406 U3.8
Net2_5: 2.5 U3.9 | length 16.1
  Signal 2 w0.508: 2.5 119.362,42.462 U3.9
Net2_6: 2.6 U3.13 | length 12.6
  Signal 2 w0.508: 2.6 115.362,36.302 U3.13
Net2_7: 2.7 U3.14 | length 14.2
  Signal 2 w0.508: 2.7 111.362,37.762 U3.14
Net2_8: 2.8 U3.11 | length 33.1
  Signal 2 w0.508: 2.8 109.612,48.332 108.966,47.686 108.966,32.512 110.998,30.48 121.184,30.48 U3.11
Net2_9: 2.9 U3.10 | length 44.3
  Signal 2 w0.508: 2.9 109.379,53.23 107.442,51.293 107.442,31.496 109.982,28.956 122.2,28.956 U3.10
Net2_10: 2.10 U3.1 | length 36.1
  Signal 2 w0.508: 2.10 109.379,57.73 105.918,54.269 105.918,30.506 U3.1
Net2_11: 2.11 U3.2 | length 49
  Signal 2 w0.508: 2.11 109.236,61.23 104.775,56.769 104.775,28.067 109.474,23.368 112.014,23.368 113.374,24.728 113.374,25.21 U3.2
Net3_1: 3.1 R15.1 | length 4.3
  GND w1.27: 3.1 84.56,61.23 85.305,61.975 R15.1
Net3_2: 3.2 U5.16 | length 62.1
  Signal 1 w0.508: U5.16 76.962,36.576 67.818,45.72 67.818,61.976 72.39,66.548 83.566,66.548 88.138,61.976 88.138,59.523 86.345,57.73 3.2
Net3_3: 3.3 U5.15 | length 78.6
  Signal 1 w0.508: U5.15 77.47,30.988 75.946,30.988 73.914,33.02 73.914,37.084 66.294,44.704 66.294,62.484 71.882,68.072 84.074,68.072 89.662,62.484 89.662,55.91 3.3@86.712,52.96
Net3_4: 3.4 U5.8 | length 27.5
  Signal 2 w0.508: 3.4@86.614,48.26 96.266,38.608 96.266,26.924 U5.8
Net3_5: 3.5 U5.9 | length 16.5
  Signal 2 w0.508: 3.5 84.362,44.924 94.742,34.544 U5.9
Net3_6: 3.6 U5.13 | length 13
  Signal 2 w0.508: 3.6 80.518,44.074 80.518,37.084 U5.13
Net3_7: 3.7 U5.14 | length 14.7
  Signal 2 w0.508: 3.7 76.2,45.068 76.2,38.862 U5.14
Net3_8: 3.8 U5.11 | length 40
  Signal 2 w0.508: 3.8 72.39,46.508 72.39,38.608 75.057,35.941 75.057,29.254 75.355,28.956 89.154,28.956 89.662,29.464 U5.11
Net3_9: 3.9 U5.10 | length 53.4
  Signal 2 w0.508: 3.9@75.212,52.96 75.059,52.807 73.889,52.807 69.85,48.768 69.85,39.116 73.914,35.052 73.914,27.94 74.422,27.432 91.694,27.432 92.202,27.94 U5.10
Net3_10: 3.10 U5.1 | length 40.2
  Signal 2 w0.508: 3.10 74.24,57.73 68.326,51.816 68.326,38.608 72.898,34.036 72.898,26.924 74.422,25.4 U5.1
Net3_11: 3.11 U5.2 | length 52.5
  Signal 2 w0.508: 3.11 73.676,61.23 66.294,53.848 66.294,39.116 71.882,33.528 71.882,25.908 73.914,23.876 77.978,23.876 U5.2
Net4_1: 4.1 R16.1 | length 5.9
  GND w1.27: 4.1 54.56,61.23 55.305,61.975 R16.1
Net4_2: 4.2 U6.16 | length 62.2
  Signal 1 w0.508: U6.16 40.894,43.688 40.894,59.944 46.99,66.04 56.642,66.04 59.69,62.992 59.69,58.758 58.662,57.73 4.2
Net4_3: 4.3 U6.15 | length 80.8
  Signal 1 w0.508: U6.15 52.07,30.988 50.546,30.988 37.592,43.942 37.592,59.436 45.72,67.564 57.15,67.564 61.214,63.5 61.214,55.782 58.662,53.23 4.3
Net4_4: 4.4 U6.8 | length 31.7
  Signal 1 w0.508: 4.4 58.122,48.73 71.374,35.478 71.374,27.432 U6.8
Net4_5: 4.5 U6.9 | length 20
  Signal 2 w0.508: 4.5 56.624,45.23 68.644,33.21 69.152,33.21 U6.9
Net4_6: 4.6 U6.13 | length 14.9
  Signal 2 w0.508: 4.6 50.362,41.84 U6.13
Net4_7: 4.7 U6.14 | length 16.5
  Signal 2 w0.508: 4.7 46.362,43.3 U6.14
Net4_8: 4.8 U6.11 | length 37
  Signal 2 w0.508: 4.8 44.612,35.906 50.038,30.48 63.754,30.48 64.262,30.988 U6.11
Net4_9: 4.9 U6.10 | length 49.5
  Signal 2 w0.508: 4.9 43.434,52.052 42.037,50.655 42.037,36.449 49.53,28.956 66.294,28.956 66.802,29.464 U6.10
Net4_10: 4.10 U6.1 | length 39.3
  Signal 2 w0.508: 4.10@44.728,57.846 40.234,53.352 40.234,36.22 50.864,25.59 51.372,25.59 U6.1
Net4_11: 4.11 U6.2 | length 51.4
  Signal 2 w0.508: 4.11 44.212,61.23 38.1,55.118 38.1,36.322 50.546,23.876 52.578,23.876 U6.2
NetC3_1: C3.1 U1.5
NetD1_2: D1.2 L1.1 Q1.4
NetD2_1: D2.1 R5.1 | length 2.9
  Power w0.254: R5.1 D2.1
NetD3_1: D3.1 L2.1 U2.3 | length 6.2
  Power w0.508: v1(31.369,13.208) v1(31.369,17.751) v1(31.369,19.431)
  other v1: 35.56,20.574 35.56,22.86 35.56,24.892
NetD4_1: D4.1 R6.1 | length 3
  Power w0.254: R6.1 D4.1
NetJ2_1: J2.1 U7.9 | length 42.7
  Signal 2 w0.508: J2.1 102.235,57.938 102.235,23.597 U7.9@106.756,19.075
NetJ2_3: J2.3 U7.8 | length 50.6
  Signal 1 w0.508: U7.8@109.195,19.075 U7.8@109.296,19.075
  Signal 2 w0.508: J2.3 98.389,59.426 98.389,60.416 99.314,61.341 102.108,61.341 103.505,59.944 103.505,24.867 U7.8@109.296,19.075
NetJ2_4: J2.4 U7.6 | length 44.4
  Signal 1 w0.508: J2.4 98.298,49.727 99.822,48.203 99.822,34.036 114.018,19.84 114.018,19.702 114.376,19.344 U7.6 U7.6@114.376,19.075
NetJ2_5: J2.5 U7.7 | length 48.7
  Signal 1 w0.508: J2.5 93.639,57.216 93.639,50.379 98.298,45.72 98.298,32.614 U7.7@111.836,19.075
NetQ1_1: Q1.1 U1.1
NetQ1_3: Q1.3 R3.1 U1.8
NetR1_1: R1.1 R1.2 R4.2 | length 7.9
  Power w0.508: R1.2 R1.2@32.966,40.714 ; R1.1 34.016,41.964 33.512,41.46 33.512,41.26 R1.2@32.966,40.714 ; R4.2 34.799,38.681 33.512,39.968 33.512,40.168 R1.2@32.966,40.714
NetR1_3: R1.3 R2.1 U1.3 | length 12.8
  Power w0.508: U1.3 23.876,42.672 24.638,43.434 31.336,43.434 R1.3 31.398,43.732 R2.1
NetR10_1: R10.1 R11.2 U2.4 | length 20.9
  Power w0.508: v1(28.702,6.096) 29.465,6.859 R11.2 R10.1 ; v1(29.21,17.78) 29.356,17.634 29.62,17.634 30.099,17.155 U2.4
  GND w0.508: v1(28.702,6.096) 28.702,17.101 29.21,17.609 v1(29.21,17.78)
NetSW1_3: SW1.3 U7.14 | length 56.9
  GND w0.508: U7.14@94.056,19.075 100.559,12.573 145.249,12.573 SW1.3
NetSW2_3: SW2.3 U7.15 | length 46.7
  GND w0.508: U7.15@91.516,19.075 100.142,10.45 SW2.3
NetSW3_3: SW3.3 U7.16 | length 26.5
  GND w0.508: SW3.3 67.834,12.192 82.093,12.192 U7.16@88.976,19.075
NetSW4_3: SW4.3 U7.17 | length 39.2
  GND w0.508: SW4.3 53.61,13.208 80.569,13.208 U7.17@86.436,19.075
NetU3_3: U3.3 U7.36 | length 37.1
  Signal 1 w0.508: U3.3 119.152,22.352 127.254,22.352 129.54,20.066 129.54,18.034 116.916,5.41 U7.36@116.916,3.835
NetU3_4: U3.4 U7.33 | length 44.2
  Signal 2 w0.508: U7.33@109.296,3.835 117.932,12.471 125.527,12.471 130.632,17.577 130.632,20.828 129.743,21.717 122.327,21.717 U3.4
NetU3_6: U3.6 U7.35 | length 38.1
  Signal 2 w0.508: U7.35@114.376,3.835 118.923,8.382 123.952,8.382 132.105,16.535 132.105,21.793 130.531,23.368 125.756,23.368 U3.6
NetU3_7: U3.7 U7.34 | length 38.5
  Signal 1 w0.508: U7.34@111.836,3.835 114.148,1.524 117.29,1.524 118.174,2.408 118.174,4.89 131.318,18.034 131.318,20.828 126.936,25.21 126.454,25.21 U3.7
NetU4_3: U4.3 U7.40 | length 32.2
  Signal 1 w0.508: U7.40@127.076,3.835 133.172,3.835 139.04,9.703 139.04,20.396 U4.3
NetU4_4: U4.4 U7.37 | length 44.8
  Signal 1 w0.508: U7.37@119.456,3.835 120.714,2.577 127.597,2.577 127.661,2.642 136.957,2.642 143.916,9.601 143.916,22.732 U4.4
NetU4_6: U4.6 U7.39 | length 40.9
  Signal 2 w0.508: U7.39@124.308,3.759 126.721,6.172 140.335,6.172 143.332,9.169 143.332,17.068 U4.6
NetU4_7: U4.7 U7.38 | length 47.9
  Signal 2 w0.508: U7.38@121.996,3.835 123.571,2.261 139.04,2.261 144.882,8.103 144.882,16.256 150.927,22.301 152.629,22.301 154.28,23.952 U4.7@154.28,25.171
NetU5_3: U5.3 U7.21 | length 29.7
  Signal 2 w0.508: v1(80.035,15.215) 80.137,15.215 v1(83.795,11.557)
  GND w0.508: U7.21 78.816,6.579 v1(83.795,11.557) ; v1(80.035,15.215) 78.969,15.215 76.479,17.704 76.479,19.939 81.94,25.4 U5.3
NetU5_4: U5.4 U7.18 | length 6.6
  Signal 1 w0.508: U7.18 83.896,24.606 84.582,25.292 U5.4
NetU5_6: U5.6 U7.20 | length 13.4
  Signal 2 w0.508: U7.20 82.682,22.987 87.249,22.987 U5.6
NetU5_7: U5.7 U7.19 | length 14.1
  Signal 2 w0.508: U7.19 83.698,21.463 89.408,21.463 92.202,24.257 U5.7
NetU6_3: U6.3 U7.29 | length 58.9
  Signal 2 w0.508: U6.3 59.563,22.479 59.563,16.129 63.369,12.323 66.671,12.323 74.422,4.572 74.422,3.048 76.327,1.143 97.409,1.143 99.081,2.815 99.081,3.825 U7.29
NetU6_4: U6.4 U7.26 | length 47.1
  Signal 2 w0.508: U6.4 60.579,24.003 60.579,17.653 64.54,13.692 66.826,13.692 75.438,5.08 75.438,3.81 77.089,2.159 89.794,2.159 U7.26
NetU6_6: U6.6 U7.28 | length 41.2
  Signal 2 w0.508: U6.6 81.153,8.509 91.968,8.509 U7.28
NetU6_7: U6.7 U7.27 | length 36.8
  Signal 1 w0.508: U6.7 66.855,25.347 66.855,24.331 82.423,8.763 89.174,8.763 U7.27
NetU7_22: U7.22
NetU7_23: U7.23
NetU7_24: U7.24
Stat_LED: R5.2 U7.1 | length 26.1
  Power w0.254: U7.1 127.076,9.83 133.096,3.81 R5.2
pads on no net: 1. 1.12 2. 2.12 3. 3.12 4. 4.12 J1.MH1 J1.MH2 SW1.2 SW1.4 SW2.2 SW2.4 SW3.2 SW3.4 SW4.2 SW4.4 U7.2 U7.3 U7.4 U7.5 U7.12 U7.13 U7.25 U7.32
copper on no net:
  other v2: 19.05,3.81 65.524,3.81 156.972,3.81 3.175,67.31 65.532,67.31 129.743,67.31 156.972,67.31

## Polygon pours and split planes (outlines as drawn)
+12V on Power "Power-+12V" (solid, pour order 53): 32.197,20.574 33.274,20.574 33.782,20.574 33.782,29.464 29.21,29.464 29.21,33.02 26.416,34.798 26.416,38.862 24.13,38.862 23.368,39.624 23.368,42.672 21.844,42.672 21.844,34.29 15.24,34.29 15.24,20.32 0.635,20.32 0.635,9.525 22.86,9.525 22.86,13.208 28.074,13.208 28.074,20.574
NetD3_1 on Power "Power-NetD3_1" (solid, pour order 49): 36.322,13.716 40.894,13.716 40.894,27.94 34.036,27.94 34.036,19.304 36.322,19.304
GND on Power "Power-GND" (solid, pour order 46): 48.514,1.27 48.514,13.208 35.814,13.208 35.814,18.796 33.274,18.796 33.274,12.573 23.622,12.573 23.622,8.89 12.7,8.89 12.7,7.62 0.635,7.62 0.635,1.27
GND on Power "GND" (solid, pour order 44): 26.67,38.862 33.274,38.862 33.274,34.29 34.036,33.528 34.036,29.718 29.464,29.718 29.464,33.528 26.67,35.306
NetC3_1 on Power "GND" (solid, pour order 37): 24.892,48.006 24.892,45.212 29.718,45.212 29.718,48.006
GND on Power "GND" (solid, pour order 36): 20.828,52.578 20.828,48.26 22.098,48.26 22.098,44.45 24.638,44.45 24.638,48.26 29.464,48.26 29.464,52.578
NetQ1_3 on Power "GND" (solid, pour order 34): 21.844,48.006 21.844,42.926 14.986,42.926 14.986,51.054 20.574,51.054 20.574,48.006
NetQ1_1 on Power "GND" (solid, pour order 35): 21.844,42.672 21.844,34.544 14.986,34.544 14.986,42.672
GND on Power "GND" (solid, pour order 33): 26.035,59.055 6.858,59.055 6.858,69.85 26.035,69.85
HV+ on Power "GND" (solid, pour order 32): 0.635,53.975 0.635,58.166 27.178,58.166 27.178,67.945 36.195,67.945 36.195,48.26 30.226,48.26 30.226,53.34 20.32,53.34 20.32,51.816 10.795,51.816 10.795,53.975
NetD1_2 on Power "GND" (solid, pour order 31): 14.605,20.955 0.635,20.955 0.635,53.34 9.525,53.34 9.525,50.165 14.605,50.165
+5V on Power "Power-+5V" (solid, pour order 26): 49.022,1.27 159.512,1.27 159.512,17.78 159.512,27.94 103.632,27.94 93.472,27.94 41.402,27.94 41.402,13.716 49.022,13.716
GND on GND "GND" (solid, pour order 54): 1.27,1.27 1.27,69.85 160.02,69.85 160.02,1.27
NetD3_1 on GND "GND" (solid, pour order 47): 30.226,12.7 33.02,12.7 33.02,14.224 32.258,14.224 32.004,14.478 32.004,16.764 33.02,16.764 33.02,19.05 36.068,19.05 36.83,19.05 36.83,27.79 32.87,27.79 30.226,25.146

## Other copper
GND:
  pour cut-out: 37.465,26.035 37.465,17.78 44.45,17.78 44.45,26.035
  pour cut-out: 8.89,31.75 6.35,29.21 6.35,19.558 6.329,19.538 8.869,16.998 19.029,16.998 21.633,19.601 21.633,29.126 21.653,29.146 19.05,31.75

## Text inside footprints (layer, text, board x,y; h text height)
C23: Top Overlay "+" at 47.244,14.986 h1.52
U3: Top Overlay "1" at 108.484,22.86 h1 r90
U4: Top Overlay "1" at 136.424,22.86 h1 r90
U5: Top Overlay "1" at 74.422,22.86 h1 r90
U6: Top Overlay "1" at 49.022,22.86 h1 r90